# Altium PCB URM.PcbDoc
Units mil, origin at the board's own origin, x right, y up, seen from the top; angles counter-clockwise.
Board outline 3558.74 x 3158.74 mil, 2 copper layers (Top Layer, Bottom Layer); 98 components, 79 nets, 268 pads, 41 vias.
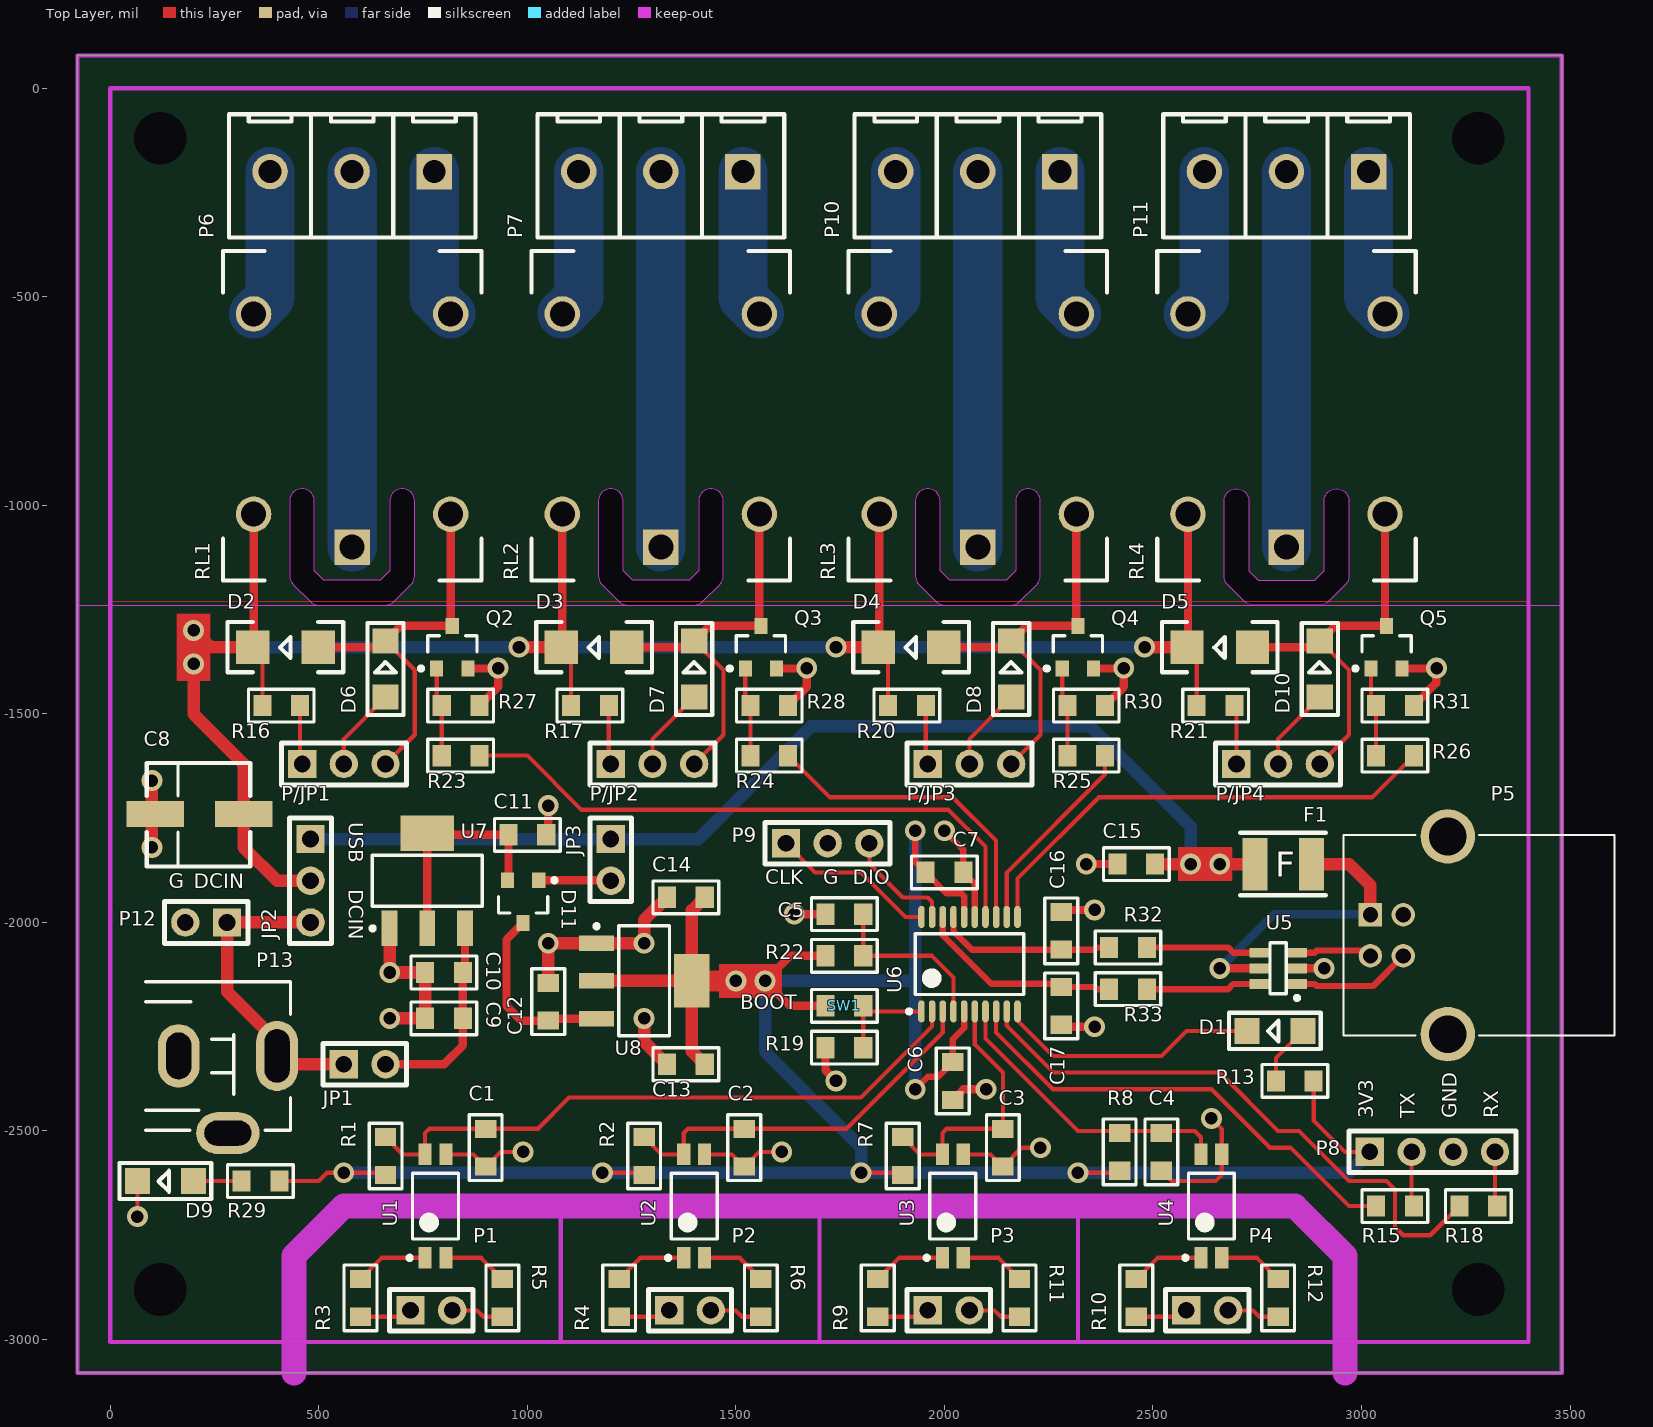
[diagram p0: Top Layer view]
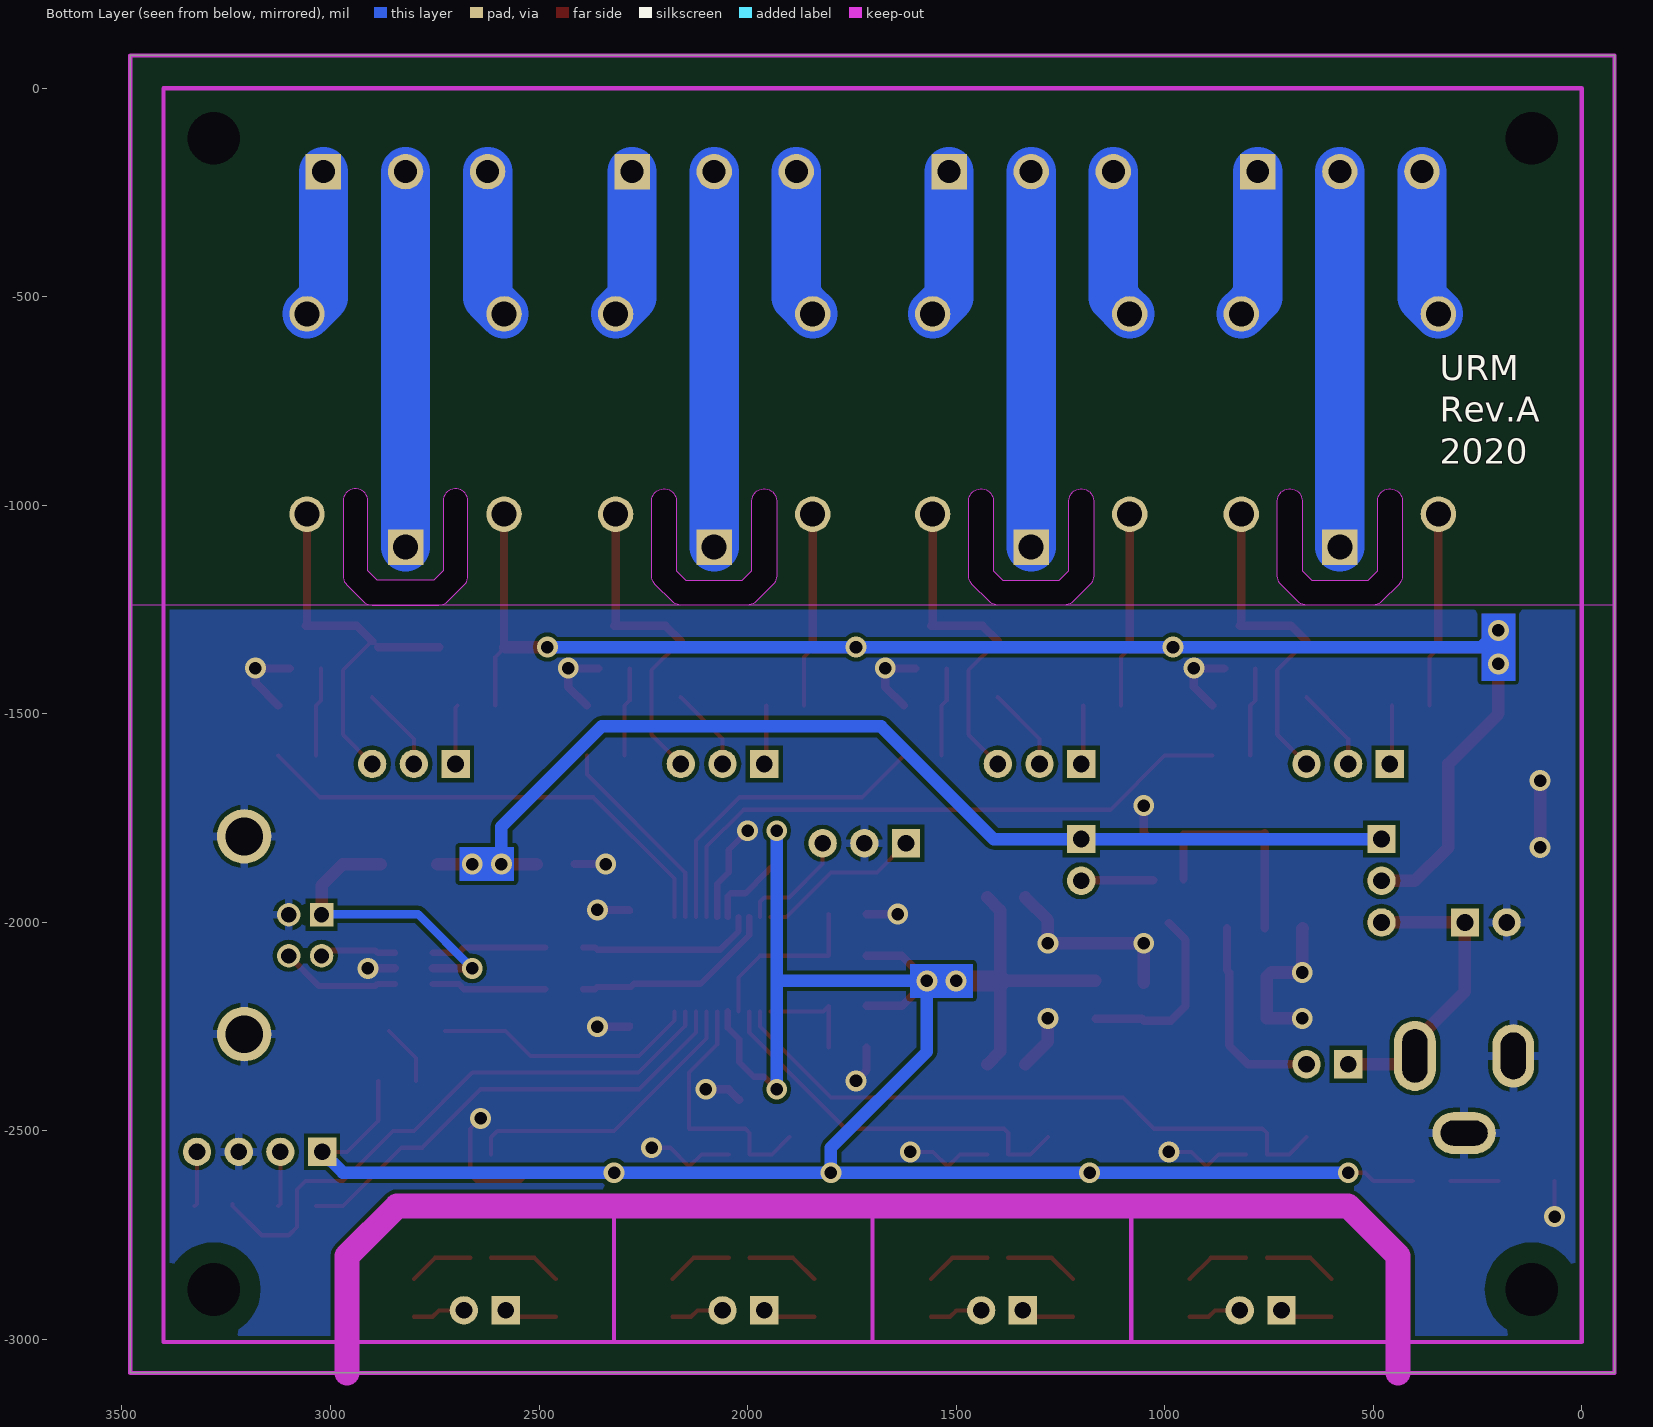
[diagram p1: Bottom Layer view, seen from below]
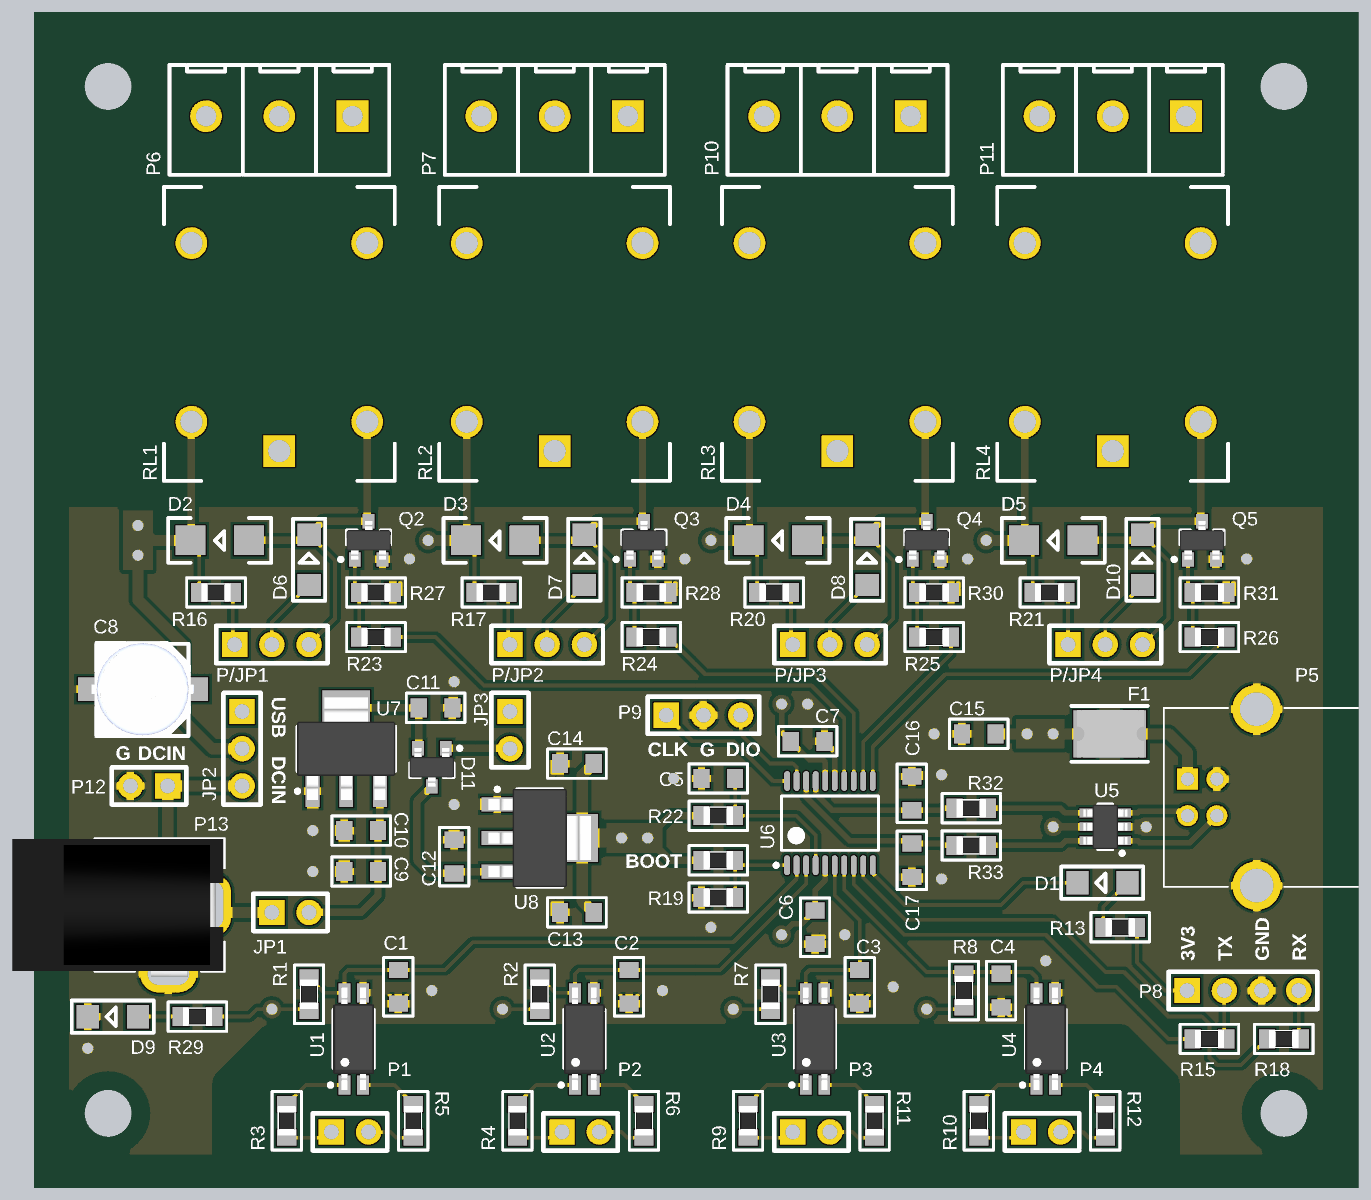
[diagram p2: 3D render of the assembled board from above, using the file's embedded part models]

## Layer stack, top to bottom
Top Solder: solder mask 0.4, Solder Resist, Dk 3.5
Top Layer: signal copper 1.4
Dielectric 1: dielectric 12.6, FR-4, Dk 4.8
Bottom Layer: signal copper 1.4
Bottom Solder: solder mask 0.4, Solder Resist, Dk 3.5

## Board outline
-78.74,-3080 -78.74,78.74 3480,78.74 3480,-3080
cut-out: 1979.12,-1230.44 cw(c2000,-1209.54) 1979.1,-1230.42 1979.11,-1230.43 ccw(c2000,-1209.54) 2000,-1239.08 2160,-1239.08 ccw(c2160,-1209.54) 2180.89,-1230.43 2180.88,-1230.44 2220.9,-1190.42 cw(c2200,-1169.54) 2220.88,-1190.44 2220.89,-1190.43 ccw(c2200,-1169.54) 2229.54,-1169.54 2229.54,-989.54 ccw(c2200,-989.54) 2170.46,-989.54 2170.46,-1157.31 2147.76,-1180 2012.24,-1180 1989.54,-1157.31 1989.54,-989.54 ccw(c1960,-989.54) 1930.46,-989.54 1930.46,-1169.54 ccw(c1960,-1169.54) 1939.11,-1190.43 1939.1,-1190.42
cut-out: 2719.1,-1230.42 ccw(c2740,-1209.54) 2719.12,-1230.44 2679.1,-1190.42 ccw(c2700,-1169.54) 2679.12,-1190.44 2679.11,-1190.43 cw(c2700,-1169.54) 2670.46,-1169.54 2670.46,-989.54 cw(c2700,-989.54) 2729.54,-989.54 2729.54,-1157.31 2752.24,-1180 2887.76,-1180 2910.46,-1157.31 2910.46,-989.54 cw(c2940,-989.54) 2969.54,-989.54 2969.54,-1169.54 cw(c2940,-1169.54) 2960.89,-1190.43 2960.9,-1190.42 cw(c2940,-1169.54) 2960.88,-1190.44 2960.9,-1190.42 2920.88,-1230.44 ccw(c2900,-1209.54) 2920.9,-1230.42 2920.89,-1230.43 cw(c2900,-1209.54) 2900,-1239.08 2740,-1239.08 cw(c2740,-1209.54)
cut-out: 1219.12,-1230.44 cw(c1240,-1209.54) 1219.1,-1230.42 1219.11,-1230.43 ccw(c1240,-1209.54) 1240,-1239.08 1400,-1239.08 ccw(c1400,-1209.54) 1420.89,-1230.43 1420.88,-1230.44 1460.9,-1190.42 cw(c1440,-1169.54) 1460.88,-1190.44 1460.89,-1190.43 ccw(c1440,-1169.54) 1469.54,-1169.54 1469.54,-989.54 ccw(c1440,-989.54) 1410.46,-989.54 1410.46,-1157.31 1387.76,-1180 1252.24,-1180 1229.54,-1157.31 1229.54,-989.54 ccw(c1200,-989.54) 1170.46,-989.54 1170.46,-1169.54 ccw(c1200,-1169.54) 1179.11,-1190.43 1179.1,-1190.42
cut-out: 479.12,-1230.44 cw(c500,-1209.54) 479.1,-1230.42 479.11,-1230.43 ccw(c500,-1209.54) 500,-1239.08 660,-1239.08 ccw(c660,-1209.54) 680.89,-1230.43 680.88,-1230.44 720.9,-1190.42 cw(c700,-1169.54) 720.88,-1190.44 720.89,-1190.43 ccw(c700,-1169.54) 729.54,-1169.54 729.54,-989.54 ccw(c700,-989.54) 670.46,-989.54 670.46,-1157.31 647.76,-1180 512.24,-1180 489.54,-1157.31 489.54,-989.54 ccw(c460,-989.54) 430.46,-989.54 430.46,-1169.54 ccw(c460,-1169.54) 439.11,-1190.43 439.1,-1190.42

## Design rules (kind name [scope] priority, off if disabled: settings)
Clearance Clearance_PolygonPourToMountingHole [All vs IsPad And Not InAnyNet] p1: gap=50 ignorepadtopadclearanceinfootprint=FALSE
Clearance [All] p2: gap=10 ignorepadtopadclearanceinfootprint=FALSE except(6: SMDPad-SMDPad)
DiffPairsRouting [All] p1: maxlimit=10 minlimit=10 mostfreqgap=10 toplayer_minwidth=15 toplayer_maxwidth=15 toplayer_prefwidth=15 bottomlayer_minwidth=15 bottomlayer_maxwidth=15 bottomlayer_prefwidth=15 maxuncoupledlength=500
HoleSize [All] p1: absolutevalues=TRUE maxlimit=248 minlimit=28 maxpercent=80.000 minpercent=20.000
PolygonConnect PolygonConnect_GroundVias [All vs InNet('GND') and IsVia] p1: connectstyle=Direct reliefconductorwidth=10 reliefentries=4 polygonreliefangle="90 Angle" airgapwidth=10
PolygonConnect PolygonConnect_GroundPadDoubleWidth [All vs InNet('GND') and IsPad] p2: connectstyle=Relief reliefconductorwidth=20 reliefentries=4 polygonreliefangle="90 Angle" airgapwidth=10
PolygonConnect [All] p3: connectstyle=Relief reliefconductorwidth=10 reliefentries=4 polygonreliefangle="90 Angle" airgapwidth=10
RoutingVias [All] p1: holewidth=28 width=50 viastyle="Through Hole" minholewidth=28 minwidth=50 maxholewidth=28 maxwidth=50
SilkToSilkClearance [All] p1 off: silktosilkclearance=10
SilkToSolderMaskClearance [IsPad] p1 off: minsilkscreentomaskgap=10 clearancetoexposedcopper=TRUE
SolderMaskExpansion [All] p1: expansion=4
UnRoutedNet [All] p1: checkbadconnections=TRUE
Width [All] p1: maxlimit=200 minlimit=10 preferedwidth=10
25 further rules are at their usual default settings.

## Classes and differential pairs
component class Relays: D2 D3 D4 D5 D6 D7 D8 D10 P6 P7 P10 P11 P/JP1 P/JP2 P/JP3 P/JP4 Q2 Q3 Q4 Q5 R16 R17 R20 R21 R23 R24 R25 R26 R27 R28 R30 R31 RL1 RL2 RL3 RL4
component class Main: C5 C6 C7 C8 C9 C10 C11 C12 C13 C14 C15 C16 C17 D1 D9 D11 F1 JP1 JP2 JP3 P5 P8 P9 P12 P13 R13 R15 R18 R19 R22 R29 R32 R33 SW1 U5 U6 U7 U8
component class Inputs: C1 C2 C3 C4 P1 P2 P3 P4 R1 R2 R3 R4 R5 R6 R7 R8 R9 R10 R11 R12 U1 U2 U3 U4
differential pair USB: +USB_P -USB_N
differential pair USBD: +USBD_P -USBD_N
differential pair USB2: +USB2_P -USB2_N

## Components (designator, comment, footprint, x,y, rotation, side; value= is the part's Value field where it differs from the comment)
C1 "100nF" C0805 900,-2540 r90 top
C2 "100nF" C0805 1520,-2540 r90 top
C3 "100nF" C0805 2140,-2540 r90 top
C4 "100nF" C0805 2520,-2550 r90 top
C5 "100nF" C0805 1760,-1980 r0 top
C6 "100nF" C0805 2020,-2380 r90 top
C7 "100nF" C0805 2000,-1880 r180 top
C8 "1uF" C_EL_6.3 320,-1740 r180 top
C9 "100nF" C0805 800,-2230 r0 top
C10 "100nF" C0805 800,-2120 r0 top
C11 "100nF" C0805 1000,-1790 r180 top
C12 "100nF" C0805 1050,-2190 r270 top
C13 "100nF" C0805 1380,-2340 r0 top
C14 "100nF" C0805 1380,-1940 r0 top
C15 "100nF" C0805 2460,-1860 r0 top
C16 "100nF" C0805 2280,-2020 r270 top
C17 "100nF" C0805 2280,-2200 r90 top
D1 "Yellow" LED1206 2860,-2260 r180 top
D2 "D_SM" DO-214AC 420,-1340 r180 top
D3 "D_SM" DO-214AC 1160,-1340 r180 top
D4 "D_SM" DO-214AC 1920,-1340 r180 top
D5 "D_SM" DO-214AC 2660,-1340 r180 top
D6 "Red" LED1206 660,-1460 r90 top
D7 "Red" LED1206 1400,-1460 r90 top
D8 "Red" LED1206 2160,-1460 r90 top
D9 "Green" LED1206 200,-2620 r180 top
D10 "Red" LED1206 2900,-1460 r90 top
D11 "BAT54C" SOT-23-127P600-8N 990,-1950 r270 top
F1 "PPTC" MF-MSMF110/16-2 2744,-1860 r0 top
JP1 "PINHDR_2x1" HEADER-2.54-2P1 560,-2340 r0 top
JP2 "VRLY" HEADER-2.54-3P1 480,-1800 r270 top
JP3 "" HEADER-2.54-2P1 1200,-1800 r270 top
P1 "PINHDR_2x1" HEADER-2.54-2P1 720,-2930 r0 top
P2 "PINHDR_2x1" HEADER-2.54-2P1 1340,-2930 r0 top
P3 "PINHDR_2x1" HEADER-2.54-2P1 1960,-2930 r0 top
P4 "PINHDR_2x1" HEADER-2.54-2P1 2580,-2930 r0 top
P5 "USB" UJ2-BH-2-TH 3021.26,-1981.57 r90 top
P6 "ED500XDS-3" ED500XDS-3 776.85,-200 r180 top locked
P7 "ED500XDS-3" ED500XDS-3 1516.85,-200 r180 top locked
P8 "UART" HEADER-2.54-4P1 3020,-2550 r0 top
P9 "SWO" HEADER-2.54-3P1 1620,-1810 r0 top
P10 "ED500XDS-3" ED500XDS-3 2276.85,-200 r180 top locked
P11 "ED500XDS-3" ED500XDS-3 3016.85,-200 r180 top locked
P12 "DCIN" HEADER-2.54-2P1 280,-2000 r180 top
P13 "DCIN" "CON JACK PWR 2.5mm PJ-002BH - duplicate" 400,-2320 r180 top
P/JP1 "PINHDR_3x1" HEADER-2.54-3P1 460,-1620 r0 top
P/JP2 "PINHDR_3x1" HEADER-2.54-3P1 1200,-1620 r0 top
P/JP3 "PINHDR_3x1" HEADER-2.54-3P1 1960,-1620 r0 top
P/JP4 "PINHDR_3x1" HEADER-2.54-3P1 2700,-1620 r0 top
Q2 "IRLML6246" SOT-23-127P600-8N 820,-1340 r90 top
Q3 "IRLML6246" SOT-23-127P600-8N 1560,-1340 r90 top
Q4 "IRLML6246" SOT-23-127P600-8N 2320,-1340 r90 top
Q5 "IRLML6246" SOT-23-127P600-8N 3060,-1340 r90 top
R1 "100R" R0805 660,-2560 r90 top
R2 "100R" R0805 1280,-2560 r90 top
R3 "100R" R0805 600,-2900 r270 top
R4 "100R" R0805 1220,-2900 r270 top
R5 "100R" R0805 940,-2900 r270 top
R6 "100R" R0805 1560,-2900 r270 top
R7 "100R" R0805 1900,-2560 r90 top
R8 "100R" R0805 2420,-2550 r90 top
R9 "100R" R0805 1840,-2900 r270 top
R10 "100R" R0805 2460,-2900 r270 top
R11 "100R" R0805 2180,-2900 r270 top
R12 "100R" R0805 2800,-2900 r270 top
R13 "100R" R0805 2840,-2380 r0 top
R15 "100R" R0805 3080,-2680 r180 top
R16 "100R" R0805 410,-1480 r180 top
R17 "100R" R0805 1150,-1480 r180 top
R18 "100R" R0805 3280,-2680 r180 top
R19 "100R" R0805 1760,-2300 r0 top
R20 "100R" R0805 1910,-1480 r180 top
R21 "100R" R0805 2650,-1480 r180 top
R22 "100R" R0805 1760,-2080 r0 top
R23 "100R" R0805 840,-1600 r0 top
R24 "100R" R0805 1580,-1600 r0 top
R25 "100R" R0805 2340,-1600 r0 top
R26 "100R" R0805 3080,-1600 r0 top
R27 "100R" R0805 840,-1480 r180 top
R28 "100R" R0805 1580,-1480 r180 top
R29 "100R" R0805 360,-2620 r0 top
R30 "100R" R0805 2340,-1480 r180 top
R31 "100R" R0805 3080,-1480 r180 top
R32 "100R" R0805 2440,-2060 r180 top
R33 "100R" R0805 2440,-2160 r180 top
RL1 "*" SRD-VDC-SL-C 580,-1100 r90 top locked
RL2 "*" SRD-VDC-SL-C 1320,-1100 r90 top locked
RL3 "*" SRD-VDC-SL-C 2080,-1100 r90 top locked
RL4 "*" SRD-VDC-SL-C 2820,-1100 r90 top locked
SW1 "SolderBridge-1" R0805 1760,-2200 r0 top
U1 "TLP290-GB-TPSE" SO-4-SOIC127P600-8N 780,-2680 r90 top
U2 "TLP290-GB-TPSE" SO-4-SOIC127P600-8N 1400,-2680 r90 top
U3 "TLP290-GB-TPSE" SO-4-SOIC127P600-8N 2020,-2680 r90 top
U4 "TLP290-GB-TPSE" SO-4-SOIC127P600-8N 2640,-2680 r90 top
U5 "USBLC6-2" USBLC6-2-SOT95P280X145-6N 2800,-2110 r180 top
U6 "STM32F072F6" TSSOP-20 2060,-2100 r90 top
U7 "LM1117IMP-5.0/NOPB" SOT-223_127P600-8N 760,-1900 r90 top
U8 "LM1117IMP-3.3/NOPB" SOT-223_127P600-8N 1280,-2140 r0 top

## Footprints (in the part's own frame and the unit in brackets; to place one, negate y for a bottom-side part, rotate by r counter-clockwise, add the part's x,y. Pads: shape width x height; smd on the part's side, far side on the other; paste and mask are expansions set on the pad)
C0805 [mm] "Chip Capacitor 0805"
  rect 1.1x1.3 smd: 1(-1.15,0) 2(1.15,0)
  silkscreen extent -2,-1 2,1, body extent -1,-0.62 1,0.63, height 0.7
C_EL_6.3 [mm]
  rect 3.5x1.6 smd: 1(0,0) 2(5.4,0)
  silkscreen extent -0.4,-3.1 5.9,3.2, body extent -0.77,-3.3 6.23,3.3, height 7.9
"CON JACK PWR 2.5mm PJ-002BH - duplicate" [mil] "Connector, Power Jack, 2.5 mm x 5.1 mm, 24 V, 5 A, Right Angle, TH"
  oval 100x167.95 hole 60 slot 127.95 at 90 deg: 1(0,0)
  oval 100x152.2 hole 60 slot 112.2 at 90 deg: 2(236,0)
  oval 152.2x100 hole 60 slot 112.2 at 0 deg: 3(118,185)
  silkscreen extent -32,-178 315,178, body extent -29,-177 537,193, height 435
DO-214AC [mil] "DO-214AC (SMA) Diode"
  rect 80x80 smd: 1(-78.5,0) 2(78.5,0)
  silkscreen extent -138,-60 138,60
ED500XDS-3 [mil]
  rect 85x85 hole 55: 1(0,0)
  round 85 hole 55: 2(196.85,0) 3(393.7,0)
  silkscreen extent -99,-138 492,157, body extent -99,-138 492,157, height 395
HEADER-2.54-2P1 [mil] "Pin Header Single Row 2 Positions Pitch 2.54 mm"
  rect 68x68 hole 40: 1(0,0)
  round 68 hole 40: 2(100,0)
  silkscreen extent -50,-50 150,50
HEADER-2.54-3P1 [mil] "Pin Header Single Row 3 Positions Pitch 2.54 mm"
  rect 68x68 hole 40: 1(0,0)
  round 68 hole 40: 2(100,0) 3(200,0)
  silkscreen extent -50,-50 250,50
HEADER-2.54-4P1 [mil] "Pin Header Single Row 4 Positions Pitch 2.54 mm"
  rect 68x68 hole 40: 1(0,0)
  round 68 hole 40: 2(100,0) 3(200,0) 4(300,0)
  silkscreen extent -50,-50 350,50
LED1206 [mm] "LED Chip 1206 (3.2mm x 1.5mm)"
  rect 1.52x1.6 smd: 1(0,0) 2(3.425,0)
  silkscreen extent -1.07,-1.1 4.52,1.1
MF-MSMF110/16-2 [mil] "PTC RESET FUSE 16V 1.1A 1812"
  rect 60x126 smd: 1(0,0) 2(136,0)
  silkscreen extent -35,-75 170,75, body extent -20,-64 160,64, height 26
R0805 [mm] "Chip Resistor 0805"
  rect 1.1x1.3 smd: 1(-1.15,0) 2(1.15,0)
  silkscreen extent -2,-1 2,1, body extent -1,-0.62 1,0.62, height 0.5
SO-4-SOIC127P600-8N [mm] "SO-4 Footprint for TLP290"
  rect 1.3x0.8 smd: 1(-3.15,0.635) 2(-3.15,-0.635) 3(3.15,-0.635) 4(3.15,0.635)
  silkscreen extent -3.27,-1.4 2,1.71, body extent -3.5,-1.4 3.5,1.4, height 2.2
SOT-23-127P600-8N [mm]
  rect 0.97x0.8 smd: 1(-1.3,0.95) 2(-1.3,-0.95) 3(1.3,0)
  silkscreen extent -1.42,-1.5 0.7,2.03, body extent -1.32,-1.52 1.32,1.52, height 1.12
SOT-223_127P600-8N [mm]
  rect 2.15x0.95 smd: 1(-2.9,2.3) 2(-2.9,0) 3(-2.9,-2.3)
  rect 2.15x3.25 smd: 4(2.9,0)
  silkscreen extent -3.02,-3.35 1.55,3.45, body extent -3.5,-3.35 3.5,3.35, height 1.8
SRD-VDC-SL-C [mil] "RELAY GEN PURPOSE SPDT (19mm x 15mm x 15mm)"
  rect 85x85 hole 60: 1(0,0)
  round 85 hole 60: 2(78.74,236.22) 3(559.06,236.22) 4(559.06,-236.22) 5(78.74,-236.22)
  silkscreen extent -80,-310 710,310, body extent -65,-295 693,295, height 602
TSSOP-20 [mm] "STM32F07x: Dimensions from datasheet"
  oval 1.35x0.4 smd: 1(-2.875,2.925) 2(-2.875,2.275) 3(-2.875,1.625) 4(-2.875,0.975) 5(-2.875,0.325) 6(-2.875,-0.325) 7(-2.875,-0.975) 8(-2.875,-1.625) 9(-2.875,-2.275) 10(-2.875,-2.925) 11(2.875,-2.925) 12(2.875,-2.275) 13(2.875,-1.625) 14(2.875,-0.975) 15(2.875,-0.325) 16(2.875,0.325) 17(2.875,0.975) 18(2.875,1.625) 19(2.875,2.275) 20(2.875,2.925)
  silkscreen extent -3,-3.3 1.85,3.8
UJ2-BH-2-TH [mm] "USB 2.0 Type B Receptacle (CUI UJ2-BH-2-TH)"
  rect 1.428x1.428 hole 0.92: 1(0,0)
  round 1.428 hole 0.92: 2(-2.5,0) 3(-2.5,-2) 4(0,-2)
  round 3.316 hole 2.3: SH(-7.27,-4.71) SH(4.77,-4.71)
  silkscreen extent -7.35,-14.87 4.85,1.63, body extent -8.77,-14.83 6.23,1.62, height 10.3
USBLC6-2-SOT95P280X145-6N [mm] "Footprint for USBLC6-2: SOT23, 6-Leads, Body 2.92x2.80mm, Pitch 0.95mm, IPC Medium Density"
  rect 1.2x0.6 smd: 1(-1.15,0.95) 2(-1.15,0) 3(-1.15,-0.95) 4(1.15,-0.95) 5(1.15,0) 6(1.15,0.95)
  silkscreen extent -1.28,-1.55 0.5,1.92, body extent -1.5,-1.53 1.5,1.53, height 1.45

## Part data
C1 C2 C3 C4 C5 C6 C7 C9 C10 C11 C12 C13 C14 C15 C16 C17: library part C, "Generic Capacitor", Tolerance=20%, MountingTechnology=SMT
C8: library part CP, "Generic Polarized Capacitor"
D1: library part LED_YELLOW, "Generic LED (Yellow)", ForwardVoltage=2.1V, EmittingColor=Yellow
D2 D3 D4 D5: "Generic Diode (Rectifier)"
D6 D7 D8 D10: library part LED_RED, "Generic LED (Red)", ForwardVoltage=1.8V, EmittingColor=Red
D9: library part LED_GREEN, "Generic LED (Green)", ForwardVoltage=2.1V, EmittingColor=Green
D11: "DIODE ARRAY SCHOTTKY COMM CATH 30V 0.2A SOT-23", Manufacturer="Diodes Incorporated", Package=SOT-23-3, PartNo=BAT54C-FDICT-ND, BaseProduct=BAT54C, DiodeConfiguration="1 Pair Common Cathode", MountingTechnology=SMT, ProductNumber=BAT54C-7-F, Supplier=DigiKey, UnitPrice=$0.18, URL=https://www.digikey.com/en/products/detail/diodes-incorporated/BAT54C-7-F/717701
F1: "PolyFuse (LittleFuse)"
JP1 P1 P2 P3 P4: "Generic Pin Header 2x1"
JP2 P9: library part PINHDR_3x1, "Generic Pin Header 3x1"
JP3 P12: library part PINHDR_2x1, "Generic Pin Header 2x1"
P5: library part UJ2-BH-2-TH, "CONN RCPT USB2.0 TYPEB 4POS R/A", Manufacturer="CUI Devices", PartNo=102-5884-ND, MountingTechnology=HMT, ProductNumber=UJ2-BH-2-TH, UnitPrice=$0.62, URL=https://www.digikey.com/en/products/detail/cui-devices/UJ2-BH-2-TH/6188079
P6 P7 P10 P11: "TERM BLK 3P SIDE ENT 5.08MM PCB", Part No=EDZ500/3DS, Rated Current=15A, Voltage=300V, Datasheet=http://www.on-shore.com/wp-content/uploads/ED500XDS.pdf, Mounting Technology=HMT, URL=https://www.digikey.com/en/products/detail/on-shore-technology-inc/EDZ500-3DS/250583
P8: library part PINHDR_4x1, "Generic Pin Header 4x1"
P13: library part PJ-002BH, "CONN PWR JACK 2.5X5.5MM SOLDER", Manufacturer="CUI Devices", PartNo=CP-002BH-ND, MountType=THT, ProductNumber=PJ-002BH, Supplier=DigiKey, UnitPrice=$0.74, URL=https://www.digikey.com/en/products/detail/cui-devices/PJ-002BH/408447
P/JP1 P/JP2 P/JP3 P/JP4: "Generic Pin Header 3x1"
Q2 Q3 Q4 Q5: library part IRLML6246TRPBF, "MOSFET N-CH 20V 4.1A SOT-23", Manufacturer="Infineon Technologies", PartNo=IRLML6246TRPBFCT-ND, ShippingPackage="Cut Tape (CT)", BaseProduct=IRLML6246, DetailedDescription="N-Channel 4.1A (Ta) 1.3W (Ta) Surface Mount Micro3™ SOT-23", Packaging=SOT-23-3, ProductNumber=IRLML6246TRPBF, Supplier=DigiKey, UnitPrice=$0.38, URL=https://www.digikey.com/en/products/detail/infineon-technologies/IRLML6246TRPBF/2393874
R1 R2 R3 R4 R5 R6 R7 R8 R9 R10 R11 R12 R13 R15 R16 R17 R18 R19 R20 R21 R22 R23 R24 R25 R26 R27 R28 R29 R30 R31 R32 R33: library part R, "Generic Resistor", Tolerance=1%, MountingTechnology=SMT
RL1 RL2 RL3 RL4: library part RELAY-SPDT, "General Purpose Power Relay SPDT (1 Form C)", Coil Voltage=12VDC, Contact Current=10A, Switching Voltage="240VAC 24VDC", Coil Type="Non Latching", Contact Form="SPDT (1 Form C)", Mounting Technology=HMT
SW1: "PCB Solder Bridge"
U1 U2 U3 U4: "OPTOISOLATOR 3.75KV TRANS 4-SO", MountingTechnology=SMT, URL=https://www.digikey.co.uk/product-detail/en/toshiba-semiconductor-and-storage/TLP290-GB-TPSE/TLP290-GB-TPSECT-ND/4562941
U5: "Low capacitance USB ESD protection"
U6: library part STM32F072F6P6, "IC MCU 32BIT 32KB FLASH 20TSSOP", Package=TSSOP-20, PartNo=497-17354-1-ND, BaseProduct=STM32F07x, ProductNumber=STM32F070F6P6TR, Supplier=DigiKey, URL=https://www.digikey.com/en/products/detail/stmicroelectronics/STM32F070F6P6TR/7313047, VisibleName=STM32F072F6
U7: "IC REG LINEAR 5V 800MA SOT223", Manufacturer="Texas Instruments", MaxInputVoltage=15V, OutputCurrent=800mA, OutputVoltage=5V, Package=SOT-223, PartNo=LM1117IMP-5.0/NOPBCT-ND, ShippingPackage="Cut Tape (CT)", VoltageDropout=1.2V, DetailedDescription="Linear Voltage Regulator IC Output 800mA SOT-223", ProductNumber=LM1117IMP-5.0/NOPB, Supplier=DigiKey, UnitPrice=$1.10, URL=https://www.digikey.com/en/products/detail/texas-instruments/LM1117IMP-5-0-NOPB/482940
U8: "IC REG LINEAR 3.3V 800MA SOT223", Manufacturer="Texas Instruments", MaxInputVoltage=15V, OutputCurrent=800mA, OutputVoltage=3.3V, Package=SOT-223, PartNo=LM1117IMP-3.3/NOPBCT-ND, ShippingPackage="Cut Tape (CT)", VoltageDropout=1.2V, DetailedDescription="Linear Voltage Regulator IC Output 800mA SOT-223", ProductNumber=LM1117IMP-3.3/NOPB, Supplier=DigiKey, UnitPrice=$1.10, URL=https://www.digikey.com/en/products/detail/texas-instruments/LM1117IMP-3-3-NOPB/482939

## Free pads (board coordinates)
  round 0 hole 125.98 unplated: ""(120,-2880) ""(120,-120) ""(3280,-2880) ""(3280,-120)

## Via types
v1: diameter 50, hole 30, Top Layer to Bottom Layer, tented both sides, 41 vias

## Nets (pads, with @x,y where several pads share a name; then routed paths per layer and width w, separated by ;. In a path a pad name is that pad's centre, name@x,y a point inside that pad or via, vN(x,y) a via of type N, cw(c..) or ccw(c..) an arc to the next point about the centre after c; other vN are vias at no path point)
3V3: C6.2 C7.2 C13.2 C14.2 P8.1 R1.1 R2.1 R7.1 R8.1 R13.2 R22.1 R29.2 SW1.1 U6.5 U6.16 U8.2 U8.4 | length 6481.2
  Top Layer w10: R29.2 500,-2620 520,-2600 v1(560,-2600) R1.1@660,-2600 ; v1(1180,-2600) 1274.72,-2600 R2.1 ; v1(1800,-2600) 1894.72,-2600 R7.1 ; v1(2320,-2600) 2415.28,-2600 R8.1 ; R13.2 2885.28,-2475.28 2960,-2550 P8.1
  Top Layer w15: v1(1930,-2400) 1960,-2370 1984.72,-2370 C6.2 2020,-2280 2047.2,-2252.8 U6.5 ; v1(1930,-1780) 1930,-1855.28 C7.2 2004.72,-1930 2040,-1930 2047.2,-1937.2 U6.16
  Top Layer w20: SW1.1 1630,-2200 v1(1570,-2140) 1630,-2080 R22.1
  Top Layer w30: U8.2 U8.4 ; C13.2 1394.17,-2308.9 U8.4 ; C14.2 1394.17,-1971.1 U8.4
  Top Layer w50: U8.4 v1(1500,-2140)
  Bottom Layer w10: 1800,-2540 1800,-2530
  Bottom Layer w30: v1(560,-2600) v1(1180,-2600) v1(1800,-2600) ; v1(1930,-2400) 1930,-2140 ; v1(1930,-1780) 1930,-2140 ; P8.1 2970,-2600 v1(2320,-2600) v1(1800,-2600) ; v1(1800,-2600) 1800,-2540 1570,-2310 v1(1570,-2140) 1930,-2140
5V: C12.2 D11.3 U8.3 | length 447.8
  Top Layer w20: D11.3 950,-2041.18 950,-2200 985.28,-2235.28 C12.2 1054.72,-2230.55 U8.3
CH1: R23.2 U6.14 | length 1472
  Top Layer w10: R23.2 1000,-1600 1130,-1730 2010,-1730 2098.39,-1818.39 U6.14
CH2: R24.2 U6.13 | length 766
  Top Layer w10: R24.2 1725.28,-1700 2020,-1700 2123.98,-1803.98 U6.13
CH3: R25.2 U6.12 | length 484.4
  Top Layer w10: U6.12 2149.57,-1880.43 2385.28,-1644.72 R25.2
CH4: R26.2 U6.11 | length 1164.2
  Top Layer w10: U6.11 2175.16,-1894.84 2370,-1700 3025.28,-1700 R26.2
DCIN: JP1.1 JP2.3 P12.1 P13.1 | length 758
  Top Layer w30: JP2.3@500,-2000 JP2.3 P12.1 280,-2166.02 400,-2286.02 P13.1 420,-2340 JP1.1
DIN1: C1.2 R1.2 U1.4 U6.2 | length 1520.7
  Top Layer w10: R1.2 701.26,-2555.98 U1.4 755,-2505 765.28,-2494.72 C1.2 1025.28,-2494.72 1100,-2420 1800,-2420 1970.43,-2249.57 U6.2
DIN2: C2.2 R2.2 U2.4 U6.3 | length 934.7
  Top Layer w10: R2.2 1321.26,-2555.98 U2.4 1375,-2505 1385.28,-2494.72 C2.2 1765.28,-2494.72 1996.02,-2263.98 U6.3
DIN3: C3.2 R7.2 U3.4 U6.6 | length 621.7
  Top Layer w10: R7.2 1941.26,-2555.98 U3.4 1995,-2505 2005.28,-2494.72 C3.2 2140,-2360 2072.8,-2292.8 U6.6
DIN4: C4.2 R8.2 U4.4 U6.7 | length 720.8
  Top Layer w10: U6.7 2098.39,-2278.39 2320,-2500 2600,-2500 2615,-2515 U4.4
GND: C1.1 C2.1 C3.1 C4.1 C5.1 C6.1 C7.1 C8.2 C9.1 C10.1 C11.1 C12.1 C13.1 C14.1 C15.1 C16.1 C17.1 D9.2 P5.4 P5.SH P8.3 P9.2 P12.2 P13.2 P13.3 Q2.2 Q3.2 Q4.2 Q5.2 R19.1 R27.1 R28.1 R30.1 R31.1 U1.3 U2.3 U3.3 U4.3 U5.2 U6.15 U7.1 U8.1 | length 3768.4
  Top Layer w10: v1(65.16,-2705.16) D9.2 ; U1.3 870.71,-2555.98 C1.1 935.28,-2550 v1(990,-2550) ; U2.3 1490.71,-2555.98 C2.1 1555.28,-2550 v1(1610,-2550) ; U3.3 2110.71,-2555.98 C3.1 2185.28,-2540 v1(2230,-2540) ; C17.1 C17.1@2284.72,-2250 ; C16.1 C16.1@2284.72,-1970 ; C4.1 2544.72,-2620 2650,-2620 2665,-2605 U4.3 2665,-2495 v1(2640,-2470)
  Top Layer w15: v1(2000,-1780) 2045.28,-1825.28 C7.1 2072.8,-1907.52 U6.15
  Top Layer w20: Q2.2 928.82,-1391.18 v1(930,-1390) 930,-1435.28 R27.1 ; C11.1 1050,-1785.28 v1(1050,-1720) ; Q3.2 1668.82,-1391.18 v1(1670,-1390) 1670,-1435.28 R28.1 ; v1(1640,-1980) C5.1 ; R19.1 1714.72,-2354.72 v1(1740,-2380) ; C6.1 2045.28,-2400 v1(2100,-2400) ; C17.1@2284.72,-2250 v1(2360,-2250) ; C16.1@2284.72,-1970 v1(2360,-1970) ; v1(2340,-1860) C15.1 ; Q4.2 2428.82,-1391.18 v1(2430,-1390) 2430,-1435.28 R30.1 ; U5.2 v1(2910,-2110) ; Q5.2 v1@3178.82,-1391.18 ; R31.1 3178.82,-1426.46 v1@3178.82,-1391.18 ; v1(3180,-1390) v1@3178.82,-1391.18
  Top Layer w30: v1(100,-1820) v1(100,-1660) ; U7.1 670,-2014.72 v1(670,-2120) 744.72,-2120 754.72,-2130 C9.1 v1(670,-2230) ; C12.1 v1(1050,-2050) 1050.55,-2049.45 U8.1 1166.38,-2050 v1(1280,-2050) 1280,-1994.72 C14.1 ; v1(1280,-2230) 1280,-2285.28 C13.1
LED: D1.2 U6.10 | length 632
  Top Layer w10: U6.10 2175.16,-2235.16 2260,-2320 2520,-2320 2580,-2260 D1.2
MCU_RX: R18.2 U6.9 | length 1414.8
  Top Layer w10: U6.9 2149.57,-2247.85 2261.72,-2360 2660,-2360 2800,-2500 2850,-2500 2970,-2620 3060,-2620 3080,-2640 3080,-2730 3100,-2750 3164.72,-2750 R18.2 R18.2@3234.72,-2674.72
MCU_TX: R15.2 U6.8 | length 1133.9
  Top Layer w10: U6.8 2123.98,-2263.98 2260,-2400 2640,-2400 2780,-2540 2830,-2540 2970,-2680 R15.2
NetC9_2: C9.2 C10.2 JP1.2 U7.3 | length 486.8
  Top Layer w20: JP1.2 800,-2340 845.28,-2294.72 C9.2 C10.2 850.55,-2114.72 U7.3
NetD1_1: D1.1 R13.1 | length 147
  Top Layer w10: R13.1 2794.72,-2325.28 D1.1
NetD2_1: D2.1 D6.2 P/JP1.3 Q2.3 RL1.5 | length 964.7
  Top Layer w10: D6.2@645.16,-1340 D6.2 730,-1395.16 730,-1550 P/JP1.3 ; Q2.3@816.22,-1285.04 Q2.3
  Top Layer w20: D2.1 D6.2@645.16,-1340 ; D6.2 696.34,-1288.82 Q2.3 ; Q2.3@816.22,-1285.04 RL1.5
NetD3_1: D3.1 D7.2 P/JP2.3 Q3.3 RL2.5 | length 964.7
  Top Layer w10: D7.2@1385.16,-1340 D7.2 1470,-1395.16 1470,-1550 P/JP2.3 ; Q3.3@1556.22,-1285.04 Q3.3
  Top Layer w20: D3.1 D7.2@1385.16,-1340 ; D7.2 1436.34,-1288.82 Q3.3 ; Q3.3@1556.22,-1285.04 RL2.5
NetD4_1: D4.1 D8.2 P/JP3.3 Q4.3 RL3.5 | length 964.7
  Top Layer w10: D8.2@2145.16,-1340 D8.2 2230,-1395.16 2230,-1550 P/JP3.3 ; Q4.3@2316.22,-1285.04 Q4.3
  Top Layer w20: D4.1 D8.2@2145.16,-1340 ; D8.2 2196.34,-1288.82 Q4.3 ; Q4.3@2316.22,-1285.04 RL3.5
NetD5_1: D5.1 D10.2 P/JP4.3 Q5.3 RL4.5 | length 964.7
  Top Layer w10: D10.2@2885.16,-1340 D10.2 2970,-1395.16 2970,-1550 P/JP4.3 ; Q5.3@3056.22,-1285.04 Q5.3
  Top Layer w20: D5.1 D10.2@2885.16,-1340 ; D10.2 2936.34,-1288.82 Q5.3 ; Q5.3@3056.22,-1285.04 RL4.5
NetD6_1: D6.1 P/JP1.2 | length 201.4
  Top Layer w10: P/JP1.2 560,-1560 D6.1
NetD7_1: D7.1 P/JP2.2 | length 201.4
  Top Layer w10: P/JP2.2 1300,-1560 D7.1
NetD8_1: D8.1 P/JP3.2 | length 201.4
  Top Layer w10: P/JP3.2 2060,-1560 D8.1
NetD9_1: D9.1 R29.1 | length 114.7
  Top Layer w10: D9.1 R29.1
NetD10_1: D10.1 P/JP4.2 | length 201.4
  Top Layer w10: P/JP4.2 2800,-1560 D10.1
NetD11_1: D11.1 JP3.2 | length 173.1
  Top Layer w20: D11.1 1198.82,-1898.82 JP3.2
NetP1_1: P1.1 R3.2 | length 126.3
  Top Layer w10: R3.2 704.72,-2945.28 P1.1
NetP1_2: P1.2 R5.2 | length 126.3
  Top Layer w10: P1.2 879.45,-2930 894.72,-2945.28 R5.2
NetP2_1: P2.1 R4.2 | length 126.3
  Top Layer w10: R4.2 1324.72,-2945.28 P2.1
NetP2_2: P2.2 R6.2 | length 126.3
  Top Layer w10: P2.2 1499.45,-2930 1514.72,-2945.28 R6.2
NetP3_1: P3.1 R9.2 | length 126.3
  Top Layer w10: R9.2 1944.72,-2945.28 P3.1
NetP3_2: P3.2 R11.2 | length 126.3
  Top Layer w10: P3.2 2120,-2930 2135.28,-2945.28 R11.2
NetP4_1: P4.1 R10.2 | length 126.3
  Top Layer w10: R10.2 2564.72,-2945.28 P4.1
NetP4_2: P4.2 R12.2 | length 126.3
  Top Layer w10: P4.2 2740,-2930 2755.28,-2945.28 R12.2
NetP6_1: P6.1 RL1.4 | length 357.3
  Bottom Layer w118.11: P6.1 776.85,-501.57 RL1.4
NetP6_2: P6.2 RL1.1 | length 900
  Bottom Layer w118.11: RL1.1 P6.2
NetP6_3: P6.3 RL1.3 | length 357.3
  Bottom Layer w118.11: RL1.3 383.15,-501.57 P6.3
NetP7_1: P7.1 RL2.4 | length 357.3
  Bottom Layer w118.11: P7.1 1516.85,-501.57 RL2.4
NetP7_2: P7.2 RL2.1 | length 900
  Bottom Layer w118.11: RL2.1 P7.2
NetP7_3: P7.3 RL2.3 | length 357.3
  Bottom Layer w118.11: RL2.3 1123.15,-501.57 P7.3
NetP8_2: P8.2 R15.1 | length 142.2
  Top Layer w10: P8.2@3120,-2540 P8.2 3120,-2674.72 R15.1
NetP8_4: P8.4 R18.1 | length 142.2
  Top Layer w10: P8.4@3320,-2540 P8.4 3320,-2674.72 R18.1
NetP10_1: P10.1 RL3.4 | length 357.3
  Bottom Layer w118.11: P10.1 2276.85,-501.57 RL3.4
NetP10_2: P10.2 RL3.1 | length 900
  Bottom Layer w118.11: RL3.1 P10.2
NetP10_3: P10.3 RL3.3 | length 357.3
  Bottom Layer w118.11: RL3.3 1883.15,-501.57 P10.3
NetP11_1: P11.1 RL4.4 | length 357.3
  Bottom Layer w118.11: P11.1 3016.85,-501.57 RL4.4
NetP11_2: P11.2 RL4.1 | length 900
  Bottom Layer w118.11: RL4.1 P11.2
NetP11_3: P11.3 RL4.3 | length 357.3
  Bottom Layer w118.11: RL4.3 2623.15,-501.57 P11.3
NetP/JP1_1: P/JP1.1 R16.1 | length 142
  Top Layer w10: R16.1 455.28,-1615.28 P/JP1.1
NetP/JP2_1: P/JP2.1 R17.1 | length 142
  Top Layer w10: R17.1 1195.28,-1615.28 P/JP2.1
NetP/JP3_1: P/JP3.1 R20.1 | length 142
  Top Layer w10: R20.1 1955.28,-1615.28 P/JP3.1
NetP/JP4_1: P/JP4.1 R21.1 | length 142
  Top Layer w10: R21.1 2700,-1484.72 P/JP4.1
NetQ2_1: Q2.1 R23.1 R27.2 | length 213.8
  Top Layer w10: Q2.1 782.6,-1467.87 R27.2 R23.1
NetQ3_1: Q3.1 R24.1 R28.2 | length 213.8
  Top Layer w10: Q3.1 1522.6,-1467.87 R28.2 R24.1
NetQ4_1: Q4.1 R25.1 R30.2 | length 213.8
  Top Layer w10: Q4.1 2282.6,-1467.87 R30.2 R25.1
NetQ5_1: Q5.1 R26.1 R31.2 | length 213.8
  Top Layer w10: Q5.1 3022.6,-1467.87 R31.2 R26.1
NetR3_1: R3.1 U1.1 | length 176
  Top Layer w10: R3.1 650.71,-2804.02 U1.1
NetR4_1: R4.1 U2.1 | length 176
  Top Layer w10: R4.1 1270.71,-2804.02 U2.1
NetR5_1: R5.1 U1.2 | length 156
  Top Layer w10: U1.2 889.29,-2804.02 R5.1
NetR6_1: R6.1 U2.2 | length 156
  Top Layer w10: U2.2 1509.29,-2804.02 R6.1
NetR9_1: R9.1 U3.1 | length 176
  Top Layer w10: R9.1 1890.71,-2804.02 U3.1
NetR10_1: R10.1 U4.1 | length 176
  Top Layer w10: R10.1 2510.71,-2804.02 U4.1
NetR11_1: R11.1 U3.2 | length 156
  Top Layer w10: U3.2 2129.29,-2804.02 R11.1
NetR12_1: R12.1 U4.2 | length 156
  Top Layer w10: U4.2 2749.29,-2804.02 R12.1
NetR19_2: R19.2 SW1.2 U6.1 | length 245
  Top Layer w10: R19.2 SW1.2 1818.46,-2213.19 U6.1
NRST: C5.2 R22.2 U6.4 | length 419.3
  Top Layer w10: C5.2 R22.2 1970,-2080 2021.61,-2131.61 U6.4
REG_5V: C11.2 D11.2 U7.2 U7.4 | length 534.5
  Top Layer w10: D11.2 D11.2@954.72,-1896.69
  Top Layer w20: U7.2 U7.4 764.17,-1790 C11.2 D11.2@954.72,-1896.69
SWCLK: P9.1 U6.20 | length 398.1
  Top Layer w10: P9.1 1690,-1880 1800,-1880 1906.81,-1986.81 U6.20
SWDIO: P9.3 U6.19 | length 284.3
  Top Layer w10: P9.3@1820,-1800 P9.3 1820,-1860 1900,-1940 1960,-1940 1970.43,-1950.43 U6.19
USB2_N: R32.1 U5.4 | length 274.7
  Top Layer w15: R32.1 2680.1,-2060 2692.7,-2072.6 U5.4
USB2_P: R33.1 U5.6 | length 274.7
  Top Layer w15: R33.1 2680.1,-2160 2692.7,-2147.4 U5.6
USB_5V: C15.2 F1.1 JP2.1 JP3.1 | length 2630
  Top Layer w30: C15.2 v1(2590,-1860) v1(2660,-1860) F1.1
  Bottom Layer w30: JP2.1@500,-1800 JP3.1 1410,-1800 1680,-1530 2350,-1530 2590,-1770 v1(2590,-1860)
USB_N: P5.2 U5.3 | length 183.3
  Top Layer w15: U5.3 2887.3,-2072.6 2892.4,-2067.5 3008.76,-2067.5 P5.2
USB_P: P5.3 U5.1 | length 286.9
  Top Layer w15: U5.1 2887.3,-2147.4 2892.4,-2152.5 3027.5,-2152.5 P5.3
USBD_N: C16.2 R32.2 U6.17 | length 427.8
  Top Layer w15: U6.17 2021.61,-2020.89 2066,-2065.28 C16.2 2360.3,-2065.28 2365.57,-2060 R32.2
USBD_P: C17.2 R33.2 U6.18 | length 496.1
  Top Layer w15: U6.18 1996.02,-2030.65 2112.6,-2147.22 2272.5,-2147.22 C17.2 2360.3,-2154.72 2365.57,-2160 R33.2
V_RLY: C8.1 D2.2 D3.2 D4.2 D5.2 JP2.2 R16.2 R17.2 R20.2 R21.2 RL1.2 RL2.2 RL3.2 RL4.2 | length 5379.2
  Top Layer w10: v1(200,-1380) 200,-1340 ; D2.2@343.78,-1337.72 D2.2 364.72,-1363.22 R16.2 ; D3.2@1083.78,-1337.72 D3.2 1104.72,-1363.22 R17.2 ; D4.2@1843.78,-1337.72 D4.2 1864.72,-1363.22 R20.2 ; D5.2@2583.78,-1337.72 D5.2 2604.72,-1363.22 R21.2
  Top Layer w20: D2.2@343.78,-1337.72 RL1.2 ; D3.2@1083.78,-1337.72 RL2.2 ; D4.2@1843.78,-1337.72 RL3.2 ; D5.2@2583.78,-1337.72 RL4.2
  Top Layer w30: v1(200,-1380) 200,-1500 320,-1620 C8.1 320,-1820 400,-1900 JP2.2 JP2.2@500,-1900 ; v1(200,-1300) 240,-1340 D2.2 ; v1(980,-1340) D3.2 ; v1(1740,-1340) D4.2 ; v1(2480,-1340) D5.2
  Bottom Layer w30: v1(200,-1300) 240,-1340 v1(980,-1340) v1(1740,-1340) v1(2480,-1340)
VBUS: F1.2 P5.1 U5.5 | length 743.3
  Top Layer w20: v1(2660,-2110) U5.5
  Top Layer w30: F1.2 2970,-1860 3021.26,-1911.26 P5.1
  Bottom Layer w20: v1(2660,-2110) 2790,-1980 3019.69,-1980 P5.1

## Polygon pours and split planes (outlines as drawn)
GND on Top Layer "NONET_L01_P002" (solid, remove dead copper, shelved, pour order 2): 0,-3005.67 0,-1230 3400,-1230 3400,-3005.67
GND on Bottom Layer "GND_L02_P000" (solid, remove dead copper, pour order 0): 0,-1240 3400,-1240 3400,-3005.67 0,-3005.67

## Keep-outs
Keep-Out Layer:
  region: -78.74,78.74 -78.74,-1240 3480,-1240 3480,78.74
  lines w10: 1080.16,-3005.67 1080.16,-2685.67 ; 1700.16,-3005.67 1700.16,-2685.67 ; 2320.16,-3005.67 2320.16,-2685.67 ; -78.74,-3080 -78.74,78.74 3480,78.74 3480,-3080 -78.74,-3080 ; 0,-3005.67 3400,-3005.67 3400,0 0,0 0,-3005.67
  lines w60: 440,-3080 440,-2800 560,-2680 2840,-2680 2960,-2800 2960,-3080

## Other copper
Top Layer:
  region net V_RLY: 160,-1260 160,-1420 240,-1420 240,-1260
  region net USB_5V: 2560,-1820 2690,-1820 2690,-1900 2560,-1900
  region net 3V3: 1460,-2100 1460,-2180 1610,-2180 1610,-2100
Bottom Layer:
  region net V_RLY: 160,-1260 240,-1260 240,-1420 160,-1420
  region net USB_5V: 2690,-1820 2560,-1820 2560,-1900 2690,-1900
  region net 3V3: 1460,-2100 1610,-2100 1610,-2180 1460,-2180

## Silkscreen, mask and mechanical layers (free items; w line width, h text height)
Top Overlay:
  text "USB" at 560,-1760 h60 r270
  text "DCIN" at 560,-1920 h60 r270
  text "CLK" at 1570,-1920 h60
  text "G" at 1710,-1920 h60
  text "DIO" at 1780,-1920 h60
  text "G" at 140,-1930 h60
  text "DCIN" at 200,-1930 h60
  text "BOOT" at 1510,-2220 h60
  text "3V3" at 3040,-2470 h60 r90
  text "TX" at 3140,-2470 h60 r90
  text "GND" at 3240,-2470 h60 r90
  text "RX" at 3340,-2470 h60 r90
Bottom Overlay:
  text "URM" at 340,-700 h60
  text "Rev.A" at 340,-800 h60
  text "2020" at 340,-900 h60
Mechanical 1:
  drawing of 300 lines, arcs and shapes, not listed

## Dimensions
120,-120 to 3280,-120 on Mechanical 11
120,-120 to 120,-2880 on Mechanical 11
-78.74,78.74 to 3480,78.74 on Mechanical 11
-78.74,78.74 to -78.74,-3080 on Mechanical 11

## Text inside footprints (layer, text, board x,y; h text height)
F1: Top Overlay "F" at 2793,-1890 h60